# Altium PCB Copy of BMS_Carrier_Board.PcbDoc (part 1 of 2)
Units mm, origin at the board's own origin, x right, y up, seen from the top; angles counter-clockwise.
Board outline 100 x 40 mm, 2 copper layers (Top Layer, Bottom Layer); 84 components, 80 nets, 335 pads, 18 vias.
Unrouted connection lines stored in the file: 187.
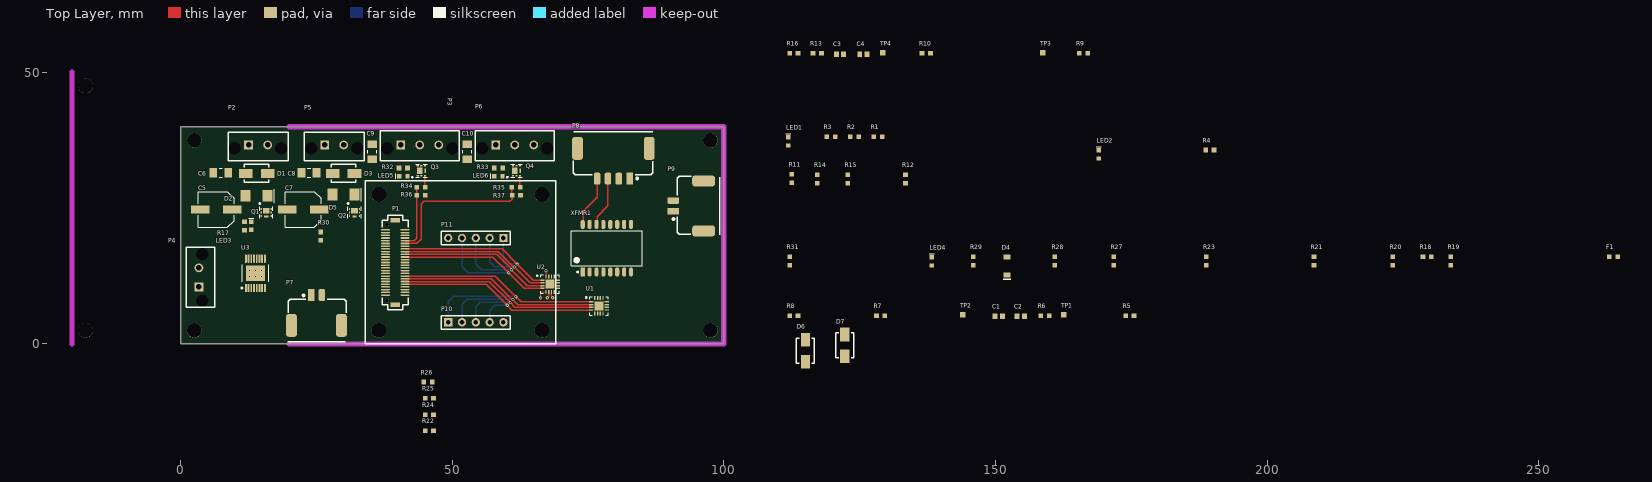
[diagram p0: Top Layer view]
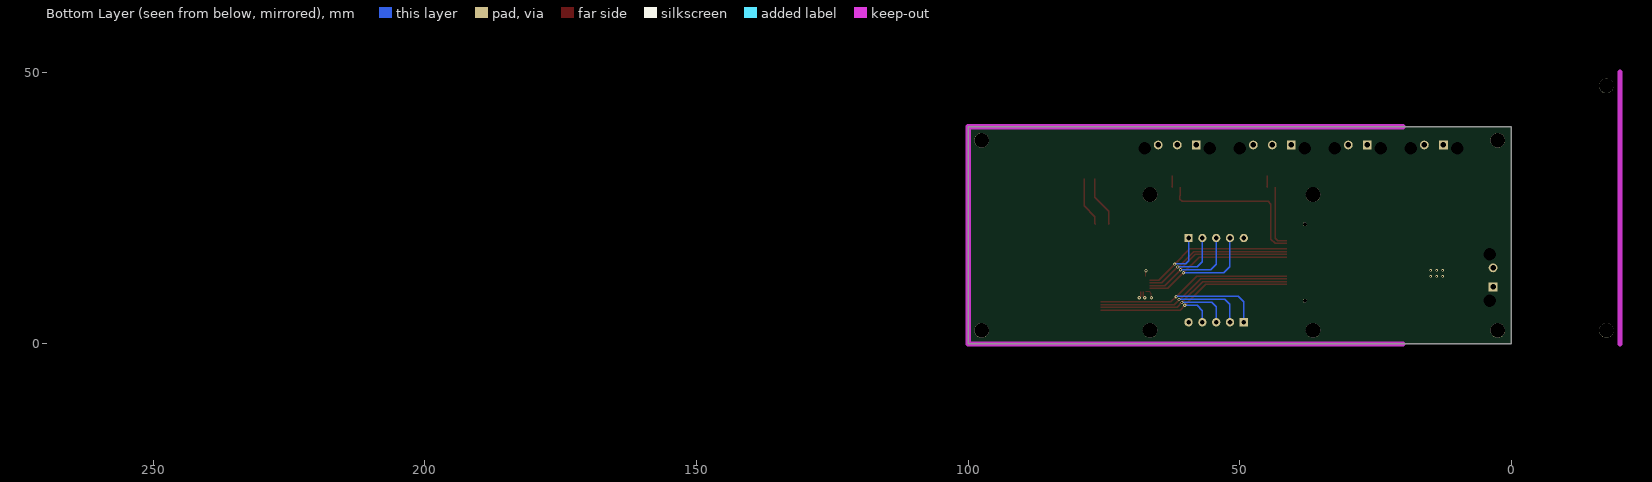
[diagram p1: Bottom Layer view, seen from below]

## Layer stack, top to bottom
Top Solder: solder mask 0.0102, Solder Resist, Dk 3.5
Top Layer: signal copper 0.0356
Dielectric 1: dielectric 0.32, FR-4, Dk 4.8
Bottom Layer: signal copper 0.0356
Bottom Solder: solder mask 0.0102, Solder Resist, Dk 3.5

## Board outline
0,0 0,40 100,40 100,0

## Design rules (kind name [scope] priority, off if disabled: settings)
Clearance [All] p1: gap=0.152 ignorepadtopadclearanceinfootprint=TRUE except(0: Arc-Hole Track-Hole SMDPad-Hole THPad-Hole Via-Hole Fill-Hole Poly-Hole Region-Hole Text-Hole)
DiffPairsRouting [All] p1: maxlimit=0.254 minlimit=0.254 mostfreqgap=0.254 toplayer_minwidth=0.229 toplayer_maxwidth=0.381 toplayer_prefwidth=0.254 bottomlayer_minwidth=0.229 bottomlayer_maxwidth=0.381 bottomlayer_prefwidth=0.254 maxuncoupledlength=12.7
PasteMaskExpansion [All] p1 off: expansion=0
PolygonConnect PolygonConnect_1 [IsPad and not InNet('NetD2_2')and not InNet('NetLED3_2')] p1: connectstyle=Relief reliefconductorwidth=0.381 reliefentries=4 polygonreliefangle="90 Angle" airgapwidth=0.254
PolygonConnect [Not(IsPad) or InNet('NetD2_2')or InNet('NetLED3_2')] p2: connectstyle=Direct reliefconductorwidth=0.254 reliefentries=4 polygonreliefangle="90 Angle" airgapwidth=0.254
RoutingVias [All] p1: holewidth=0.3 width=0.6 viastyle="Through Hole" minholewidth=0.3 minwidth=0.3 maxholewidth=1.27 maxwidth=1.27 viatemplateguid#1={C0391581-418B-4562-8F26-D689074507C8} viatemplatename#1=v60h30m0mx0
SilkToBoardRegionClearance [All] p1 off:
SilkToSilkClearance [All] p1 off: silktosilkclearance=0.254
SilkToSolderMaskClearance [IsPad] p1 off: minsilkscreentomaskgap=0.254 clearancetoexposedcopper=TRUE
SolderMaskExpansion [All] p1: expansion=0.102
Width [All] p1: maxlimit=2.54 minlimit=0.203 preferedwidth=0.203
25 further rules are at their usual default settings.

## Classes and differential pairs
component class "BMS Carrier - Fan Controls": C9 C10 D6 D7 LED5 LED6 Q3 Q4 R32 R33 R34 R35 R36 R37
component class "BMS Carrier - Battery Relay Controls": C5 C6 C7 C8 D1 D2 D3 D4 D5 F1 LED3 LED4 Q1 Q2 R17 R18 R19 R20 R21 R22 R23 R24 R25 R26 R27 R28 R29 R30 R31 U3
component class "BMS Carrier - Current Sense Interface": C3 C4 P11 R9 R10 R11 R12 R13 R14 R15 R16 TP3 TP4 U2 XFMR1
component class "BMS Carrier - AFE Interface": C1 C2 P10 R5 R6 R7 R8 TP1 TP2 TP3/MOSI U1
component class "BMS Carrier - Connectors": LED2 P2 P3 P4 P5 P6 P7 P8 P9 R4
component class Controller_Board_Interface: LED1 P1 R1 R2 R3
differential pair I: +I_P -I_N
differential pair ISOSPI: +ISOSPI_P -ISOSPI_N
differential pair CURR: +CURR_P -CURR_N
differential pair CURR_ISOSPI: +CURR_ISOSPI_P -CURR_ISOSPI_N

## Components (designator, comment, footprint, x,y, rotation, side; value= is the part's Value field where it differs from the comment)
C1 "CAP CER 0.1UF 50V 10% X7R 0603" "CAP, 0603" 150.57,5.099 r0 top
C2 "CAP CER 20PF 50V ±5% C0G/NP0 0603" "CAP, 0603" 154.634,5.099 r0 top
C3 "CAP CER 0.1UF 50V 10% X7R 0603" "CAP, 0603" 121.36,53.359 r0 top
C4 "CAP CER 20PF 50V ±5% C0G/NP0 0603" "CAP, 0603" 125.678,53.359 r0 top
C5 "EEE-1HA4R7NP" "CAP ALUM 6.3MM RADIAL SMD" 6.55,24.75 r180 top
C6 "CAP CER 2.2UF 100V ±20% X7R 1206" "CAP, 1206" 7.375,31.5 r180 top
C7 "EEE-1HA4R7NP" "CAP ALUM 6.3MM RADIAL SMD" 22.55,24.75 r180 top
C8 "CAP CER 2.2UF 100V ±20% X7R 1206" "CAP, 1206" 23.625,31.5 r180 top
C9 "CAP CER 2.2UF 100V ±20% X7R 1206" "CAP, 1206" 35.25,35.375 r270 top
C10 "CAP CER 2.2UF 100V ±20% X7R 1206" "CAP, 1206" 52.75,35.375 r270 top
D1 "DIODE SCHOTTKY 60V 3A SMA" "Diode, SMA" 16,31.4 r180 top
D2 "DIODE ZENER 16V 5W DO-214AA (SMB)" "DO-214AA Diode" 11.936,27.3 r0 top
D3 "DIODE SCHOTTKY 60V 3A SMA" "Diode, SMA" 32,31.4 r180 top
D4 "MMSD301T1G" "DIODE SOD123" 152.094,12.719 r90 top
D5 "DIODE ZENER 16V 5W DO-214AA (SMB)" "DO-214AA Diode" 27.936,27.5 r0 top
D6 "DIODE SCHOTTKY 60V 3A SMA" "Diode, SMA" 115,-3.25 r90 top
D7 "DIODE SCHOTTKY 60V 3A SMA" "Diode, SMA" 122.25,-2.25 r90 top
F1 "0603L004YR" "RES, 0603" 263.727,16.021 r0 top
LED1 "LED RED CLEAR 2V 0603" LED_0603 111.835,36.595 r90 top
LED2 "LED GREEN CLEAR 2V 0603" LED_0603 168.985,34.182 r90 top
LED3 "LED YELLOW CLEAR 2.1V 0603" LED_0603 13.01,21.05 r90 top
LED4 "LED YELLOW CLEAR 2.1V 0603" LED_0603 138.251,14.497 r90 top
LED5 "LED YELLOW CLEAR 2.1V 0603" LED_0603 41.7,30.89 r180 top
LED6 "LED YELLOW CLEAR 2.1V 0603" LED_0603 59.2,30.89 r180 top
P1 "CONN 50POS Bergstak Plug 0.02\"" "CONN, Bergstak 50 Pos Plug" 39.5,15 r0 top
P2 "CONN 2POS ULTRA-FIT NATURAL COLOR 0.138\"" "CONN, 2POS ULTRA-FIT - NATURAL COLOR" 12.5,36.63 r0 top
P3 "CONN 3POS ULTRA-FIT 0.138\"" "CONN, 3POS ULTRA-FIT" 40.5,36.63 r0 top
P4 "CONN 2POS ULTRA-FIT 0.138\"" "CONN, 2POS ULTRA-FIT" 3.37,10.5 r90 top
P5 "CONN 2POS ULTRA-FIT NATURAL COLOR 0.138\"" "CONN, 2POS ULTRA-FIT - NATURAL COLOR" 26.5,36.63 r0 top
P6 "CONN 3POS ULTRA-FIT 0.138\"" "CONN, 3POS ULTRA-FIT" 58,36.63 r0 top
P7 "Dura-Clik" "CONN, 2POS Dura-Click Vertical" 24,9 r0 top
P8 "Dura-Clik" "CONN, 4POS DURA-CLIK VERT" 82.65,30.42 r180 top
P9 "Dura-Clik" "CONN, 2POS Dura-Click Vertical" 90.67,24.4 r90 top
P10 "5POS 0.1\"" "CONN, 5POS HEADR 0.1\"" 49.25,4 r0 top
P11 "5POS 0.1\"" "CONN, 5POS HEADR 0.1\"" 59.41,19.5 r180 top
Q1 "MOSFET N-CH 30V 8.7A 2.1W 6-PQFN (2x2)" "MOSFET N-CH 30V 12A 2mmx2mm PQFN" 14.825,24.85 r270 top
Q2 "MOSFET N-CH 30V 8.7A 2.1W 6-PQFN (2x2)" "MOSFET N-CH 30V 12A 2mmx2mm PQFN" 31.075,24.85 r270 top
Q3 "MOSFET N-CH 30V 8.7A 2.1W 6-PQFN (2x2)" "MOSFET N-CH 30V 12A 2mmx2mm PQFN" 43.65,30.955 r0 top
Q4 "MOSFET N-CH 30V 8.7A 2.1W 6-PQFN (2x2)" "MOSFET N-CH 30V 12A 2mmx2mm PQFN" 61.15,30.955 r0 top
R1 "RES 0.0 OHM 1/4W 0603" "RES, 0603" 128.345,38.119 r0 top
R2 "RES 604 OHM 1% 1/10W 0603" "RES, 0603" 124.027,38.119 r0 top
R3 "RES 0.0 OHM 1/4W 0603" "RES, 0603" 119.709,38.119 r0 top
R4 "RES 4.7K OHM 1% 1/10W 0603" "RES, 0603" 189.432,35.706 r0 top
R5 "2K" "RES, 0603" 174.7,5.226 r0 top
R6 "RES 120 OHM 1% 1/10W 0603" "RES, 0603" 159.079,5.226 r0 top
R7 "RES 1.4k OHM 1% 1/10W 0603" "RES, 0603" 128.853,5.226 r0 top
R8 "RES 604 OHM 1% 1/10W 0603" "RES, 0603" 112.851,5.226 r0 top
R9 "2K" "RES, 0603" 166.191,53.486 r0 top
R10 "RES 120 OHM 1% 1/10W 0603" "RES, 0603" 137.235,53.486 r0 top
R11 "RES 0.0 OHM 1/4W 0603" "RES, 0603" 112.451,30.48 r90 top
R12 "RES 0.0 OHM 1/4W 0603" "RES, 0603" 133.425,30.372 r90 top
R13 "RES 1.4k OHM 1% 1/10W 0603" "RES, 0603" 117.169,53.486 r0 top
R14 "RES 0.0 OHM 1/4W 0603" "RES, 0603" 117.169,30.372 r90 top
R15 "RES 0.0 OHM 1/4W 0603" "RES, 0603" 122.757,30.372 r90 top
R16 "RES 604 OHM 1% 1/10W 0603" "RES, 0603" 112.851,53.486 r0 top
R17 "RES 4.7K OHM 1% 1/10W 0603" "RES, 0603" 11.75,21.725 r270 top
R18 "RES 10K OHM 1% 1/10W 0603" "RES, 0603" 229.437,16.021 r0 top
R19 "RES 10K OHM 1% 1/10W 0603" "RES, 0603" 233.755,15.259 r90 top
R20 "RES 22.1 OHM 1% 1/10W 0603" "RES, 0603" 223.087,15.259 r90 top
R21 "RES 10K OHM 1% 1/10W 0603" "RES, 0603" 208.609,15.259 r90 top
R22 "RES 10K OHM 1% 1/10W 0603" "RES, 0603" 45.775,-16 r180 top
R23 "RES 10K OHM 1% 1/10W 0603" "RES, 0603" 188.797,15.259 r90 top
R24 "RES 10K OHM 1% 1/10W 0603" "RES, 0603" 45.775,-13 r180 top
R25 "RES 10K OHM 1% 1/10W 0603" "RES, 0603" 45.775,-10 r180 top
R26 "RES 10K OHM 1% 1/10W 0603" "RES, 0603" 45.55,-7 r180 top
R27 "RES 806 OHM 1% 1/10W 0603" "RES, 0603" 171.779,15.259 r90 top
R28 "RES 4.7K OHM 1% 1/10W 0603" "RES, 0603" 160.857,15.259 r90 top
R29 "RES 4.7K OHM 1% 1/10W 0603" "RES, 0603" 145.871,15.259 r90 top
R30 "RES 22.1 OHM 1% 1/10W 0603" "RES, 0603" 25.797,19.837 r90 top
R31 "RES 10K OHM 1% 1/10W 0603" "RES, 0603" 112.089,15.259 r90 top
R32 "RES 4.7K OHM 1% 1/10W 0603" "RES, 0603" 40.975,32.38 r0 top
R33 "RES 4.7K OHM 1% 1/10W 0603" "RES, 0603" 58.525,32.38 r0 top
R34 "RES 22.1 OHM 1% 1/10W 0603" "RES, 0603" 44.225,28.88 r180 top
R35 "RES 22.1 OHM 1% 1/10W 0603" "RES, 0603" 61.725,28.88 r180 top
R36 "RES 10K OHM 1% 1/10W 0603" "RES, 0603" 44.225,27.38 r0 top
R37 "RES 10K OHM 1% 1/10W 0603" "RES, 0603" 61.775,27.38 r0 top
TP1 "Test Point" "Test Point" 162.508,5.353 r90 top
TP2 "Test Point" "Test Point" 143.966,5.353 r90 top
TP3 "Test Point" "Test Point" 158.698,53.613 r90 top
TP4 "Test Point" "Test Point" 129.234,53.613 r90 top
U1 "IC ISOSPI COMM INTERFACE LTC6820IUD" "IC COMM INTERFACE ISOSPI 16-QFN" 75.575,7.75 r0 top
U2 "IC ISOSPI COMM INTERFACE LTC6820IUD" "IC COMM INTERFACE ISOSPI 16-QFN" 66.575,11.75 r0 top
U3 "VNQ7040AJTR" "IC DVR HIGH-SIDE 1CH POWERSSO-16" 13.75,13 r90 top
XFMR1 "IC PULSE XFMR 1CT:1CT 350UH SMD" "IC, PULSE XFMR 1CT:1CT 350UH SMD" 78.445,17.625 r90 top

## Footprints (in the part's own frame and the unit in brackets; to place one, negate y for a bottom-side part, rotate by r counter-clockwise, add the part's x,y. Pads: shape width x height; smd on the part's side, far side on the other; paste and mask are expansions set on the pad)
"CAP ALUM 6.3MM RADIAL SMD" [mm] "Aluminum Electrolytic Capacitor, Body 6.50x6.50x5.50mm, IPC Low Density"
  rect 3.45x1.55 smd: 1(-2.95,0) 2(2.95,0)
  silkscreen extent -3.3,-3.3 3.3,3.3, body extent -3.9,-3.3 3.9,3.3, height 5.5
"CAP, 0603" [mm] "Chip Capacitor, 2-Leads, Body 1.60x0.81mm, IPC Medium Density"
  rect 0.9x1 smd mask+0.076: 1(-0.675,0) 2(0.675,0)
  body extent -0.87,-0.48 0.87,0.48, height 0.9
"CAP, 1206" [mm] "Chip Capacitor, 2-Leads, Body 3.20x1.60mm, IPC Medium Density"
  rect 1.4x1.8 smd: 1(-1.375,0) 2(1.375,0)
  silkscreen extent -0.3,-0.8 0.3,0.8, body extent -1.68,-0.87 1.67,0.87, height 1.8
"CONN, 2POS Dura-Click Vertical" [mm] "WM7169CT-ND"
  rect 1.2x2.2 smd: 1(0,0)
  rrect50% 1.2x2.2 smd: 2(2,0)
  rrect50% 2x4.2 smd: 3(-3.6,-5.58) 3(5.6,-5.58)
  silkscreen extent -4.28,-8.6 6.5,0.05, body extent -4.45,-8.63 6.45,0.52, height 8
"CONN, 2POS ULTRA-FIT" [mm] "2 Positions Header, Shrouded Connector 0.138\" (3.50mm) Through Hole Gold"
  rect 1.6x1.6 hole 1.02: 1(0,0)
  round 1.6 hole 1.02: 2(3.5,0)
  round 1.6 hole 2.3: ""(-2.5,-0.63) ""(6,-0.63)
  silkscreen extent -3.74,-2.93 7.33,2.37, body extent -3.48,-2.87 7.12,5.79, height 13.85
"CONN, 2POS ULTRA-FIT - NATURAL COLOR" [mm] "2 Positions Header, Shrouded Connector 0.138\" (3.50mm) Through Hole Gold"
  rect 1.6x1.6 hole 1.02: 1(0,0)
  round 1.6 hole 1.02: 2(3.5,0)
  round 1.6 hole 2.3: ""(-2.5,-0.63) ""(6,-0.63)
  silkscreen extent -3.74,-2.93 7.33,2.37, body extent -3.48,-2.87 7.12,5.79, height 13.85
"CONN, 3POS ULTRA-FIT" [mm]
  rect 1.6x1.6 hole 1.02: 1(0,0)
  round 1.6 hole 1.02: 2(3.5,0) 3(7,0)
  round 0 hole 2.3: ""(-2.5,-0.63) ""(9.5,-0.63)
  silkscreen extent -3.8,-2.93 10.8,2.62, body extent -3.55,-2.67 10.55,5.99, height 13.85
"CONN, 4POS DURA-CLIK VERT" [mm]
  rect 1.2x2.2 smd: 1(0,0)
  rrect50% 1.2x2.2 smd: 2(2,0) 3(4,0) 4(6,0)
  rrect50% 2x4.2 smd: 7(-3.6,-5.58) 7(9.6,-5.58)
  silkscreen extent -4.28,-8.61 10.42,0.05, body extent -4.28,-8.61 10.32,0.54, height 8
"CONN, 5POS HEADR 0.1\"" [mil]
  rect 60x60 hole 33.46: 1(0,0)
  round 60 hole 33.46: 2(100,0) 3(200,0) 4(300,0) 5(400,0)
  silkscreen extent -50,-50 450,48, body extent -50,-50 450,48, height 335
"CONN, Bergstak 50 Pos Plug" [mm] "Bergstak 50 Position Plug"
  rect 1.6x0.3 smd: 1(1.8,6)
  oval 1.6x0.3 smd: 2(1.8,5.5) 3(1.8,5) 4(1.8,4.5) 5(1.8,4) 6(1.8,3.5) 7(1.8,3) 8(1.8,2.5) 9(1.8,2) 10(1.8,1.5) 11(1.8,1) 12(1.8,0.5) 13(1.8,0) 14(1.8,-0.5) 15(1.8,-1) 16(1.8,-1.5) 17(1.8,-2) 18(1.8,-2.5) 19(1.8,-3) 20(1.8,-3.5) 21(1.8,-4) 22(1.8,-4.5) 23(1.8,-5) 24(1.8,-5.5) 25(1.8,-6) 26(-1.8,-6) 27(-1.8,-5.5) 28(-1.8,-5) 29(-1.8,-4.5) 30(-1.8,-4) 31(-1.8,-3.5) 32(-1.8,-3) 33(-1.8,-2.5) 34(-1.8,-2) 35(-1.8,-1.5) 36(-1.8,-1) 37(-1.8,-0.5) 38(-1.8,0) 39(-1.8,0.5) 40(-1.8,1) 41(-1.8,1.5) 42(-1.8,2) 43(-1.8,2.5) 44(-1.8,3) 45(-1.8,3.5) 46(-1.8,4) 47(-1.8,4.5) 48(-1.8,5) 49(-1.8,5.5) 50(-1.8,6)
  round 0.7 hole 0.7: ""(-1.5,-7.05) ""(-1.5,7.05)
  rect 1.8x0.8 smd: ""(0,-7.8) ""(0,7.8)
  silkscreen extent -2.4,-8.7 2.4,8.7
"DIODE SOD123" [mm]
  rect 0.91x1.22 smd: 1(0,0) 2(3.28,0)
  silkscreen extent -0.8,-0.7 -0.8,0.7, body extent -0.22,-0.9 3.49,0.9, height 1.35
"Diode, SMA" [mm]
  rect 2.5x1.7 smd: 1(0,0) 2(4,0)
  silkscreen extent -0.25,-1.65 4.32,1.65, body extent -0.69,-1.45 4.59,1.47, height 2.41
"DO-214AA Diode" [mil] "Zener Diode 16V 5W SMBJ5353B-TP"
  rect 70x85 smd: 1(0,0) 2(160,0)
  silkscreen extent 209,-50 209,47, body extent -21,-60 187,55, height 95
"IC COMM INTERFACE ISOSPI 16-QFN" [mm] "16-WFQFN Exposed Pad"
  rect 0.75x0.25 smd: 1(0,0) 2(0,-0.5) 3(0,-1) 4(0,-1.5) 9(2.85,-1.5) 10(2.85,-1) 11(2.85,-0.5) 12(2.85,0)
  rect 0.25x0.75 smd: 5(0.675,-2.175) 6(1.175,-2.175) 7(1.675,-2.175) 8(2.175,-2.175) 13(2.175,0.675) 14(1.675,0.675) 15(1.175,0.675) 16(0.675,0.675)
  rect 1.65x1.65 smd: 17(1.425,-0.75)
  silkscreen extent -1.05,-2.45 3.13,0.95, body extent -0.17,-2.35 3.03,0.85, height 0.8
"IC DVR HIGH-SIDE 1CH POWERSSO-16" [mm] "SSOP, 16-Leads, Body 4.90x3.90mm, Pitch 0.50mm, Thermal Pad 3.50x2.80mm, IPC Medium Density"
  rect 1.5x0.35 smd: 1(-2.7,1.75)
  rrect50% 1.5x0.35 smd: 2(-2.7,1.25) 3(-2.7,0.75) 4(-2.7,0.25) 5(-2.7,-0.25) 6(-2.7,-0.75) 7(-2.7,-1.25) 8(-2.7,-1.75) 9(2.7,-1.75) 10(2.7,-1.25) 11(2.7,-0.75) 12(2.7,-0.25) 13(2.7,0.25) 14(2.7,0.75) 15(2.7,1.25) 16(2.7,1.75)
  rect 2.8x3.5 smd: 17(0,0)
  silkscreen extent -2.82,-2.45 1.55,2.6, body extent -3,-2.45 3,2.45, height 1.7
"IC, PULSE XFMR 1CT:1CT 350UH SMD" [mm] "PULSE XFMR 1CT:1CT 350UH SMD"
  rect 1.7x0.76 smd: 1(-4.375,4.445)
  oval 1.7x0.76 smd: 2(-4.375,3.175) 3(-4.375,1.905) 4(-4.375,0.635) 5(-4.375,-0.635) 6(-4.375,-1.905) 7(-4.375,-3.175) 8(-4.375,-4.445) 9(4.375,-4.445) 10(4.375,-3.175) 11(4.375,-1.905) 12(4.375,-0.635) 13(4.375,0.635) 14(4.375,1.905) 15(4.375,3.175) 16(4.375,4.445)
  silkscreen extent -4.5,-6.55 3.2,6.55, body extent -4.65,-6.55 4.65,6.55, height 5.9
LED_0603 [mm]
  rect 0.8x0.8 smd: 1(-0.05,0.01) 2(1.45,0.01)
  silkscreen extent 2.13,-0.46 2.13,0.45, body extent -0.09,-0.39 1.51,0.41, height 0.8
"MOSFET N-CH 30V 12A 2mmx2mm PQFN" [mm] "PQFN, 6-Leads, Body 2.00x2.00mm, Pitch 0.65mm/0.50mm, Thermal Pad 1.00x1.20mm, IPC Medium Density"
  rect 0.4x0.25 smd: 1(0,0) 2(0.65,0) 3(1.3,0) 4(1.3,1.85) 5(0.65,1.85) 6(0,1.85)
  rect 1x1.2 smd: 7(0.35,0.925)
  rect 0.3x0.79 smd: 8(1.39,0.925)
  silkscreen extent -1.14,-0.38 1.7,2.12, body extent -0.4,-0.13 1.7,1.97, height 1
"RES, 0603" [mm] "Chip Resistor, 2-Leads, Body 1.60x0.80mm, IPC Medium Density"
  rect 0.85x0.85 smd: 1(-0.775,0) 2(0.775,0)
  body extent -0.8,-0.4 0.8,0.4, height 0.55
"Test Point" [mm]
  rect 1x1 smd paste-2: TP(0,0)

## Part data
C1 C3: "0.10µF ±10% 50V Ceramic Capacitor X7R 0603 (1608 Metric)", Capacitance=0.1µF, Manufacturer 1="AVX Corporation", Manufacturer Part Number 1=06035C104KAT2A, Operating Temperature="-55°C ~ 125°C", Package / Case="0603 (1608 Metric)", Ratings=-, Supplier Part Number 1=478-5052-1-ND, Temperature Coefficient=X7R, Tolerance=±10%, Voltage=50V, ComponentLink1Description=http://datasheets.avx.com/X7RDielectric.pdf, ComponentLink1URL=http://datasheets.avx.com/X7RDielectric.pdf, Height - Seated (Max)=-, Lead Spacing=-, Lead Style=-, Mounting Type="Surface Mount, MLCC", Packaging="Cut Tape (CT)", Part Status=Active, Size / Dimension="0.063\" L x 0.032\" W (1.60mm x 0.81mm)", Supplier 1=Digi-Key, Thickness (Max)="0.035\" (0.90mm)"
C2 C4: "20pF ±5% 50V Ceramic Capacitor C0G, NP0 0603 (1608 Metric)", Capacitance=20pF, Manufacturer 1="Murata Electronics North America", Manufacturer Part Number 1=GRM1885C1H200JA01D, Operating Temperature="-55°C ~ 125°C", Package / Case="0603 (1608 Metric)", Ratings=-, Supplier Part Number 1=490-1410-1-ND, Temperature Coefficient="C0G, NP0", Tolerance=±5%, Voltage=50V, ComponentLink1Description=http://www.murata.com/~/media/webrenewal/support/library/catalog/products/capacitor/mlcc/c02e.ashx, ComponentLink1URL=http://www.murata.com/~/media/webrenewal/support/library/catalog/products/capacitor/mlcc/c02e.ashx, Height - Seated (Max)=-, Lead Spacing=-, Lead Style=-, Mounting Type="Surface Mount, MLCC", Packaging="Cut Tape (CT)", Part Status=Active, Size / Dimension="0.063\" L x 0.031\" W (1.60mm x 0.80mm)", Supplier 1=Digi-Key, Thickness (Max)="0.035\" (0.90mm)"
C5 C7: library part "CAP ALUM 4.7UF 20% 50V SMD", "4.7µF 50V Aluminum Electrolytic Capacitors Radial, Can - SMD 2000 Hrs @ 85°C", Capacitance=4.7uF, Case/Package=Radial, Manufacturer 1=Panasonic, Max Operating Temperature=85°C, Min Operating Temperature=-40°C, Package Quantity=1, Ripple Current=31mA, Supplier Part Number 1=PCE4304CT-ND, Tolerance=20%, Voltage Rating=50V, ComponentLink1Description=https://datasheet.ciiva.com/46374/aba0000ce2-46374373.pdf, ComponentLink1URL=https://datasheet.ciiva.com/46374/aba0000ce2-46374373.pdf, ComponentLink2Description=https://datasheet.ciiva.com/14600/70255710-14600343.pdf, ComponentLink2URL=https://datasheet.ciiva.com/14600/70255710-14600343.pdf, ComponentLink3Description=https://datasheet.ciiva.com/17536/aba0000ce2-17536647.pdf, ComponentLink3URL=https://datasheet.ciiva.com/17536/aba0000ce2-17536647.pdf, ComponentLink4Description=https://datasheet.ciiva.com/24027/aba0000ce2-40801-24027083.pdf, ComponentLink4URL=https://datasheet.ciiva.com/24027/aba0000ce2-40801-24027083.pdf, ComponentLink5Description=https://datasheet.ciiva.com/31414/aba0000ce2-31414684.pdf, ComponentLink5URL=https://datasheet.ciiva.com/31414/aba0000ce2-31414684.pdf, ComponentLink6Description=https://datasheet.ciiva.com/14606/70255710-14606079.pdf, ComponentLink6URL=https://datasheet.ciiva.com/14606/70255710-14606079.pdf, Description 1="CAPACITOR ALUM ELEC, 4.7UF, 50V, 20%, SMD", Diameter=6.3mm, Height=5.4mm, Height - Seated (Max)=0.213inch, Lead Free="Lead Free", Length=5.5mm, Life (Hours)=2000Hour, Manufacturer Part Number 1=EEE-1HA4R7NP, Mount="Surface Mount,PCB", Packaging="Tape and Reel", Pricing 1="1=0.43, 10=0.302, 100=0.1986, 500=0.1471 (USD)", Radiation Hardening=No, REACH SVHC="No SVHC", Ripple Current (AC)=31mA, Stock 1=19771, Supplier 1=Digi-Key, Termination=SMD/SMT, Voltage Rating (DC)=50V, Width=650um
C6 C8 C9 C10: "2.2µF ±20% 100V Ceramic Capacitor X7R 1206 (3216 Metric)", Capacitance=2.2µF, Manufacturer 1="Murata Electronics North America", Manufacturer Part Number 1=GRM31CR72A225MA73L, Operating Temperature="-55°C ~ 125°C", Package / Case="1206 (3216 Metric)", Ratings=-, Supplier Part Number 1=490-12773-1-ND, Temperature Coefficient=X7R, Tolerance=±20%, Voltage=100V, ComponentLink1Description=http://www.murata.com/~/media/webrenewal/support/library/catalog/products/capacitor/mlcc/c02e.ashx, ComponentLink1URL=http://www.murata.com/~/media/webrenewal/support/library/catalog/products/capacitor/mlcc/c02e.ashx, Height - Seated (Max)=-, Lead Spacing=-, Lead Style=-, Mounting Type="Surface Mount, MLCC", Packaging="Cut Tape (CT)", Part Status=Active, Size / Dimension="0.126\" L x 0.063\" W (3.20mm x 1.60mm)", Supplier 1=Digi-Key, Thickness (Max)="0.071\" (1.80mm)"
D1 D3 D6 D7: "Diode Schottky 60V 3A Surface Mount SMA", Capacitance @ Vr, F="200pF @ 4V, 1MHz", Current - Average Rectified (Io)=3A, Current - Reverse Leakage @ Vr="500µA @ 60V", Manufacturer 1="Diodes Incorporated", Manufacturer Part Number 1=B360A-13-F, Operating Temperature - Junction="-55°C ~ 150°C", Package / Case="DO-214AC, SMA", Supplier Device Package=SMA, Supplier Part Number 1=B360A-FDICT-ND, Voltage - DC Reverse (Vr) (Max)=60V, Voltage - Forward (Vf) (Max) @ If="700mV @ 3A", ComponentLink1Description=https://www.diodes.com/assets/Datasheets/ds30891.pdf, ComponentLink1URL=https://www.diodes.com/assets/Datasheets/ds30891.pdf, Diode Type=Schottky, Mounting Type="Surface Mount", Packaging="Cut Tape (CT)", Part Status=Active, Speed="Fast Recovery =< 500ns, > 200mA (Io)", Supplier 1=Digi-Key
D2 D5: "Zener Diode 16V 5W ±5% Surface Mount DO-214AA (SMB)", Manufacture="Micro Commercial Co", Manufacture Part Number=SMBJ5353B-TP, Power (Max)=5W, Supplier Part Number 1=SMBJ5353B-TPMSCT-ND, Voltage - Forward="1.2V @ 1A", Voltage - Zener (Nom)=16V, Impedence (Max)="2.5 Ohm", Supplier 1=Digi-Key
D4: library part "DIODE SCHOTTKY SMALL SIG 30V 200MA SOD123", "Diode Schottky 30V 200mA (DC) Surface Mount SOD-123", Average Rectified Current=200mA, Case/Package=SOD-123-2, Current Rating=100mA, Forward Voltage=600mV, Manufacturer 1="ON Semiconductor", Max Forward Surge Current (Ifsm)=1A, Max Operating Temperature=125°C, Max Repetitive Reverse Voltage (Vrrm)=30V, Max Reverse Leakage Current=200nA, Min Operating Temperature=-55°C, Package Quantity=3000, Power Dissipation=225mW, Supplier Part Number 1=MMSD301T1GOSCT-ND, ComponentLink1Description=https://datasheet.ciiva.com/927/mmsd301t1-d-927472.pdf, ComponentLink1URL=https://datasheet.ciiva.com/927/mmsd301t1-d-927472.pdf, ComponentLink2Description=https://datasheet.ciiva.com/5763/85966-5763040.pdf, ComponentLink2URL=https://datasheet.ciiva.com/5763/85966-5763040.pdf, ComponentLink3Description=https://datasheet.ciiva.com/915/mmsd301t1-d-915476.pdf, ComponentLink3URL=https://datasheet.ciiva.com/915/mmsd301t1-d-915476.pdf, ComponentLink4Description=https://datasheet.ciiva.com/915/mmsd301t1-d-915477.pdf, ComponentLink4URL=https://datasheet.ciiva.com/915/mmsd301t1-d-915477.pdf, ComponentLink5Description=https://datasheet.ciiva.com/915/mmsd301t1-d-915478.pdf, ComponentLink5URL=https://datasheet.ciiva.com/915/mmsd301t1-d-915478.pdf, ComponentLink6Description=https://datasheet.ciiva.com/25947/mmsd301t1-d-25947942.pdf, ComponentLink6URL=https://datasheet.ciiva.com/25947/mmsd301t1-d-25947942.pdf, ComponentLink7Description=https://datasheet.ciiva.com/8299/mmsd301t1-d-8299881.pdf, ComponentLink7URL=https://datasheet.ciiva.com/8299/mmsd301t1-d-8299881.pdf, ComponentLink8Description=https://datasheet.ciiva.com/16215/mmsd301t1-d-16215580.pdf, ComponentLink8URL=https://datasheet.ciiva.com/16215/mmsd301t1-d-16215580.pdf, Contact Plating=Tin,Matte, Description 1="DIODE SCHOTTKY 30V 200MA SOD123", Element Configuration=Single, Forward Current=200mA, Height=1.25mm, Lead Free="Lead Free", Length=2.84mm, Manufacturer Part Number 1=MMSD301T1G, Max Reverse Voltage (DC)=30V, Number of Pins=2, Output Current=200mA, Packaging="Tape and Reel", Peak Reverse Current=200nA, Polarity=Standard, Pricing 1="1=0.37, 10=0.301, 100=0.1597, 500=0.1051, 1000=0.0714 (USD)", Radiation Hardening=No, REACH SVHC="No SVHC", Reverse Voltage (DC)=30V, Stock 1=23461, Supplier 1=Digi-Key, Termination=SMD/SMT, Voltage Rating (DC)=30V, Width=1.8mm
F1: library part "FUSE PTC RESET 24V 40MA 0603", "Polymeric PTC Resettable Fuse 24V 40mA Ih Surface Mount 0603 (1608 Metric), Concave", Case/Package=0603, Case Code (Metric)=1608, Hold Current=40mA, Manufacturer 1=Littelfuse, Max Current Rating=20A, Max Operating Temperature=85°C, Max Voltage Rating (DC)=24V, Min Operating Temperature=-40°C, Package Quantity=4000, Power Dissipation=500mW, Supplier Part Number 1=F6263CT-ND, Trip Current=120mA, Approvals=cULus,TUV, Case Code (Imperial)=0603, ComponentLink1Description=https://datasheet.ciiva.com/29603/littelfuse-ptc-0603l-29603319.pdf, ComponentLink1URL=https://datasheet.ciiva.com/29603/littelfuse-ptc-0603l-29603319.pdf, Description 1="PTC 24V POLYFUSE SMT 0603 .035A", Manufacturer Part Number 1=0603L004YR, Packaging="Tape and Reel", Pricing 1="1=2.61, 5=2.488, 10=2.363, 50=1.9068, 100=1.6166, 250=1.5751, 500=1.3264, 1000=1.1813 (USD)", Stock 1=21365, Supplier 1=Digi-Key, Time to Trip=1s
LED1: "Red 631nm LED Indication - Discrete 2V 0603 (1608 Metric)", Color=Red, Current - Test=20mA, Lens Color=Colorless, Manufacturer="Wurth Electronics Inc.", Manufacturer Part Number=150060RS75000, Millicandela Rating=250mcd, Package / Case="0603 (1608 Metric)", Supplier Device Package=0603, Supplier Part Number 1=732-4978-1-ND, Voltage - Forward (Vf) (Typ)=2V, Category=Optoelectronics, ComponentLink1Description=http://katalog.we-online.de/led/datasheet/150060RS75000.pdf, ComponentLink1URL=http://katalog.we-online.de/led/datasheet/150060RS75000.pdf, Features=-, Height (Max)=0.80mm, Lens Style/Size="Rectangle with Flat Top, 1.10mm x 0.70mm", Lens Transparency=Clear, Mounting Type="Surface Mount", Packaging="Cut Tape (CT)", Part Status=Active, Pricing 1="1=0.21, 100=0.1617, 500=0.13964 (CAD)", RoHS="RoHS Compliant", Size / Dimension="1.60mm L x 0.80mm W", Stock 1=35521, Supplier 1=Digi-Key, Viewing Angle=140°, Wavelength - Dominant=625nm, Wavelength - Peak=630nm
LED2: "Green 572nm LED Indication - Discrete 2V 0603 (1608 Metric)", Color=Green, Current - Test=20mA, Lens Color=Colorless, Manufacturer="Wurth Electronics Inc.", Manufacturer Part Number=150060VS75000, Millicandela Rating=40mcd, Package / Case="0603 (1608 Metric)", Supplier Device Package=0603, Supplier Part Number 1=732-4980-1-ND, Voltage - Forward (Vf) (Typ)=2V, Category=Optoelectronics, ComponentLink1Description=http://katalog.we-online.de/led/datasheet/150060VS75000.pdf, ComponentLink1URL=http://katalog.we-online.de/led/datasheet/150060VS75000.pdf, Features=-, Height (Max)=0.80mm, Lens Style/Size="Rectangle with Flat Top, 1.10mm x 0.70mm", Lens Transparency=Clear, Mounting Type="Surface Mount", Packaging="Cut Tape (CT)", Part Status=Active, Pricing 1="1=0.21, 100=0.1617, 500=0.13964 (CAD)", RoHS="RoHS Compliant", Size / Dimension="1.60mm L x 0.80mm W", Stock 1=9408, Supplier 1=Digi-Key, Viewing Angle=140°, Wavelength - Dominant=570nm, Wavelength - Peak=572nm
LED3 LED4 LED5 LED6: "Yellow 590nm LED Indication - Discrete 2V 0603 (1608 Metric)", Color=Yellow, Current - Test=20mA, Lens Color=Colorless, Manufacturer="Wurth Electronics Inc.", Manufacturer Part Number=150060YS75000, Millicandela Rating=120mcd, Package / Case="0603 (1608 Metric)", Supplier Device Package=0603, Supplier Part Number 1=732-4981-1-ND, Voltage - Forward (Vf) (Typ)=2V, Category=Optoelectronics, ComponentLink1Description=http://katalog.we-online.de/led/datasheet/150060YS75000.pdf, ComponentLink1URL=http://katalog.we-online.de/led/datasheet/150060YS75000.pdf, Features=-, Height (Max)=0.80mm, Lens Style/Size="Rectangle with Flat Top, 1.10mm x 0.70mm", Lens Transparency=Clear, Mounting Type="Surface Mount", Packaging="Cut Tape (CT)", Part Status=Active, Pricing 1="1=0.21, 100=0.1617, 500=0.13964 (CAD)", RoHS="RoHS Compliant", Size / Dimension="1.60mm L x 0.80mm W", Stock 1=10523, Supplier 1=Digi-Key, Viewing Angle=140°, Wavelength - Dominant=590nm, Wavelength - Peak=595nm
P1: "50 Position Connector Plug, Outer Shroud Contacts Surface Mount Gold", Manufacturer 1="Amphenol FCI", Manufacturer Part Number 1=10132797-055100LF, Supplier Part Number 1=609-5226-1-ND, ComponentLink1Description=http://portal.fciconnect.com/Comergent//fci/drawing/10132797.pdf, ComponentLink1URL=http://portal.fciconnect.com/Comergent//fci/drawing/10132797.pdf, Connector Type="Plug, Outer Shroud Contacts", Contact Finish=Gold, Contact Finish Thickness="1µin (0.025µm)", Height Above Board="0.169\" (4.30mm)", Mated Stacking Heights=5mm, Mounting Type="Surface Mount", Number of Positions=50, Number of Rows=2, Packaging="Cut Tape (CT)", Part Status=Active, Pitch="0.020\" (0.50mm)", Series="BergStak Plug", Supplier 1=Digi-Key
P2 P5: "2 Positions Header, Shrouded Connector 0.138\" (3.50mm) Through Hole", Color=White, Current Rating=-, Insulation Color=Natural, Manufacturer 1="Molex, LLC", Manufacturer Part Number 1=1722872102, Material Flammability Rating="UL94 V-0", Operating Temperature="-40°C ~ 105°C", Supplier Part Number 1=WM11722-ND, Voltage=400V, ComponentLink1Description=http://www.molex.com/pdm_docs/sd/1722872102_sd.pdf, ComponentLink1URL=http://www.molex.com/pdm_docs/sd/1722872102_sd.pdf, Connector Type=Header, Contact Finish - Mating=Tin, Contact Finish - Post=Tin, Contact Finish Thickness - Mating="60µin (1.52µm)", Contact Finish Thickness - Post="60µin (1.52µm)", Contact Length - Mating=-, Contact Length - Post="0.126\" (3.20mm)", Contact Material="Copper Alloy", Contact Shape=Square, Contact Type="Male Pin", Fastening Type="Latch Holder", Ingress Protection=-, Insulation Height="0.465\" (11.80mm)", Insulation Material="Liquid Crystal Polymer (LCP)", Mated Stacking Heights=26.99mm, Mounting Type="Through Hole", Number of Positions=2, Number of Positions Loaded=All, Number of Rows=1, Overall Contact Length=-, Packaging=Tray, Part Status=Active, Pitch - Mating="0.138\" (3.50mm)", Row Spacing - Mating=-, Series=UltraFit, Shrouding="Shrouded - 4 Wall", Style="Board to Cable/Wire", Supplier 1=Digi-Key, Termination=Solder
P3 P6: "3 Positions Header Connector 0.138\" (3.50mm) Through Hole Tin", Current Rating=-, Insulation Color=Black, Manufacturer 1="Molex, LLC", Manufacturer Part Number 1=1722871103, Material Flammability Rating="UL94 V-0", Operating Temperature="-40°C ~ 105°C", Supplier Part Number 1=WM11702-ND, Voltage=400V, ComponentLink1Description=http://www.molex.com/pdm_docs/sd/1722871103_sd.pdf, ComponentLink1URL=http://www.molex.com/pdm_docs/sd/1722871103_sd.pdf, Connector Type=Header, Contact Finish - Mating=Tin, Contact Finish - Post=Tin, Contact Finish Thickness - Mating="60µin (1.52µm)", Contact Finish Thickness - Post="60µin (1.52µm)", Contact Length - Mating=-, Contact Length - Post="0.126\" (3.20mm)", Contact Material="Copper Alloy", Contact Shape=Square, Contact Type="Male Pin", Fastening Type="Latch Holder", Ingress Protection=-, Insulation Height="0.465\" (11.80mm)", Insulation Material="Liquid Crystal Polymer (LCP)", Mated Stacking Heights=26.99mm, Mounting Type="Through Hole", Number of Positions=3, Number of Positions Loaded=All, Number of Rows=1, Overall Contact Length=-, Packaging=Tray, Part Status=Active, Pitch - Mating="0.138\" (3.50mm)", Row Spacing - Mating=-, Series=UltraFit, Shrouding="Shrouded - 4 Wall", Style="Board to Cable/Wire", Supplier 1=Digi-Key, Termination=Solder
P4: "2 Positions Header, Shrouded Connector 0.138\" (3.50mm) Through Hole Gold", Current Rating=-, Insulation Color=Black, Manufacturer 1="Molex, LLC", Manufacturer Part Number 1=1722861302, Material Flammability Rating="UL94 V-0", Operating Temperature="-40°C ~ 120°C", Supplier Part Number 1=WM11673-ND, Voltage=400V, ComponentLink1Description=http://www.molex.com/pdm_docs/sd/1722861302_sd.pdf, ComponentLink1URL=http://www.molex.com/pdm_docs/sd/1722861302_sd.pdf, Connector Type=Header, Contact Finish - Mating=Gold, Contact Finish - Post=Tin, Contact Finish Thickness - Mating="30µin (0.76µm)", Contact Finish Thickness - Post="60µin (1.52µm)", Contact Length - Mating=-, Contact Length - Post="0.126\" (3.20mm)", Contact Material="Copper Alloy", Contact Shape=Square, Contact Type="Male Pin", Fastening Type="Latch Holder", Ingress Protection=-, Insulation Height="0.465\" (11.80mm)", Insulation Material="Liquid Crystal Polymer (LCP)", Mated Stacking Heights=26.99mm, Mounting Type="Through Hole", Number of Positions=2, Number of Positions Loaded=All, Number of Rows=1, Overall Contact Length=-, Packaging=Tray, Part Status=Active, Pitch - Mating="0.138\" (3.50mm)", Row Spacing - Mating=-, Series=UltraFit, Shrouding="Shrouded - 4 Wall", Style="Board to Board or Cable", Supplier 1=Digi-Key, Termination="Kinked Pin, Solder"
P7 P9: library part "CONN 2POS DURA-CLIK 0.079\" VERT", "2 Positions Header, Shrouded Connector 0.079\" (2.00mm) Surface Mount, Vertical Tin", Current Rating=-, Insulation Color=Natural, Manufacturer="Molex, LLC", Manufacturer Part Number=5600200220, Supplier Part Number 1=WM10862CT-ND, Applications="Automotive, Industrial", Category="Connectors, Interconnects", ComponentLink1Description=http://www.molex.com/pdm_docs/sd/5600200220_sd.pdf, ComponentLink1URL=http://www.molex.com/pdm_docs/sd/5600200220_sd.pdf, Connector Type=Header, Contact Finish - Mating=Tin, Contact Finish - Post=Tin, Contact Finish Thickness - Mating=-, Contact Finish Thickness - Post=-, Contact Length - Mating=-, Contact Length - Post=-, Contact Material="Copper Alloy", Contact Shape=Square, Contact Type="Male Pin", Fastening Type="Latch Lock", Features="Solder Retention", Ingress Protection=-, Insulation Height="0.315\" (8.00mm)", Insulation Material="Polyamide (PA), Nylon", Mated Stacking Heights=9.3mm, Material Flammability Rating=-, Mounting Type="Surface Mount", Number of Positions=2, Number of Positions Loaded=All, Number of Rows=1, Operating Temperature=-, Overall Contact Length=-, Packaging="Cut Tape (CT)", Part Status=Active, Pitch - Mating="0.079\" (2.00mm)", Pricing 1="1=1.16, 10=1.012, 25=0.952, 50=0.9122, 100=0.8727, 250=0.79336 (CAD)", RoHS="RoHS Compliant", Row Spacing - Mating=-, Shrouding="Shrouded - 4 Wall", Stock 1=11912, Style="Board to Cable/Wire", Supplier 1=Digi-Key, Termination=Solder, Voltage Rating=-
P8: library part "CONN 4POS DURA-CLIK 0.079\"", "4 Positions Header Connector 0.079\" (2.00mm) Surface Mount Tin", Current Rating=-, Insulation Color=Natural, Manufacturer="Molex, LLC", Manufacturer Part Number=5600200420, Supplier Part Number 1=WM10864CT-ND, Applications="Automotive, Industrial", Category="Connectors, Interconnects", ComponentLink1Description=http://www.molex.com/pdm_docs/sd/5600200420_sd.pdf, ComponentLink1URL=http://www.molex.com/pdm_docs/sd/5600200420_sd.pdf, Connector Type=Header, Contact Finish - Mating=Tin, Contact Finish - Post=Tin, Contact Finish Thickness - Mating=-, Contact Finish Thickness - Post=-, Contact Length - Mating=-, Contact Length - Post=-, Contact Material="Copper Alloy", Contact Shape=Square, Contact Type="Male Pin", Fastening Type="Latch Lock", Features="Solder Retention", Ingress Protection=-, Insulation Height="0.315\" (8.00mm)", Insulation Material="Polyamide (PA), Nylon", Mated Stacking Heights=9.3mm, Material Flammability Rating=-, Mounting Type="Surface Mount", Number of Positions=4, Number of Positions Loaded=All, Number of Rows=1, Operating Temperature=-, Overall Contact Length=-, Packaging="Cut Tape (CT)", Part Status=Active, Pitch - Mating="0.079\" (2.00mm)", Pricing 1="1=2.23, 10=2.022, 25=1.898, 50=1.8156, 100=1.733 (CAD)", RoHS="RoHS Compliant", Row Spacing - Mating=-, Shrouding="Shrouded - 4 Wall", Stock 1=9367, Style="Board to Cable/Wire", Supplier 1=Digi-Key, Termination=Solder, Voltage Rating=-
P10 P11: library part "CONN 5POS HEADR MALE 0.1\"", Colour=Black, Contact Resistance=20mR, Manufacturer 1=Molex, Manufacturer Part Number 1=0022284050, Max Operating Temperature=75°C, Max Voltage Rating (AC)=250V, Min Operating Temperature=0°C, Supplier Part Number 1=WM50014-05-ND, ComponentLink1Description=https://datasheet.ciiva.com/6814/022284363-sd-6814049.pdf, ComponentLink1URL=https://datasheet.ciiva.com/6814/022284363-sd-6814049.pdf, ComponentLink2Description=https://datasheet.ciiva.com/14804/179390022284050-pcb-headers-14804361.pdf, ComponentLink2URL=https://datasheet.ciiva.com/14804/179390022284050-pcb-headers-14804361.pdf, ComponentLink3Description=https://datasheet.ciiva.com/15217/getdatasheetpartid-256138-15217709.pdf, ComponentLink3URL=https://datasheet.ciiva.com/15217/getdatasheetpartid-256138-15217709.pdf, Connector Type="Male Pin", Contact Material=Bronze,Brass, Contact Mating Length=0.24inch, Contact Plating=Nickel,Tin, Depth=2.49mm, Description 1="Conn Unshrouded Header HDR 5 POS 2.54mm Solder ST Thru-Hole KK® Bag", Gender=Male, Housing Colour=Black, Housing Material=Nylon, Length=12.7mm, Max Voltage Rating (DC)=250V, Mount="Through Hole", Number of Contacts=5, Number of Positions=5, Number of Rows=1, Orientation=Straight, Packaging=Bulk, Pitch=2.54mm, Pricing 1="1=0.22, 10=0.21, 25=0.1796, 50=0.157, 100=0.1459, 250=0.129, 500=0.1234 (USD)", Stock 1=3161, Supplier 1=Digi-Key, Termination=Solder
Q1 Q2 Q3 Q4: Current - Continuous Drain (Id) @ 25°C=8.7A, Drain to Source Voltage (Vdss)=30V, Drive Voltage (Max Rds On,  Min Rds On)="2.5V, 4.5V", Input Capacitance (Ciss) (Max) @ Vds="1019pF @ 25V", Manufacturer 1="Infineon Technologies", Manufacturer Part Number 1=IRLHS6342TRPBF, Operating Temperature="-55°C ~ 150°C (TJ)", Package / Case=6-PowerVDFN, Power Dissipation (Max)=2.1W, Supplier Device Package="6-PQFN (2x2)", Supplier Part Number 1=IRLHS6342TRPBFCT-ND, Category="Discrete Semiconductor Products", ComponentLink1Description=http://www.infineon.com/dgdl/irlhs6342pbf.pdf?fileId=5546d462533600a401535663b52625ad, ComponentLink1URL=http://www.infineon.com/dgdl/irlhs6342pbf.pdf?fileId=5546d462533600a401535663b52625ad, Description 1="MOSFET N-CH 30V 8.7A 2X2 PQFN", FET Feature=-, FET Type=N-Channel, Gate Charge (Qg) (Max) @ Vgs="11nC @ 4.5V", Mounting Type="Surface Mount", Packaging="Cut Tape (CT)", Part Status=Active, Pricing 1="1=0.79, 10=0.685, 100=0.5118, 500=0.4022, 1000=0.31079 (CAD)", Rds On (Max) @ Id, Vgs="15.5 mOhm @ 8.5A, 4.5V", RoHS="RoHS Compliant", Stock 1=9984, Supplier 1=Digi-Key, Technology="MOSFET (Metal Oxide)", Vgs (Max)=±12V, Vgs(th) (Max) @ Id="1.1V @ 10µA"
R1 R3 R11 R12 R14 R15: "RES SMD 0.0 OHM JUMPER 1/4W 0603", Manufacturer 1="Vishay Dale", Manufacturer Part Number 1=CRCW06030000Z0EAHP, Operating Temperature="-55°C ~ 155°C", Package / Case="0603 (1608 Metric)", Power (Watts)=1/4W, Resistance=0.0, Supplier Device Package=0603, Supplier Part Number 1=541-0.0SBCT-ND, ComponentLink1Description=http://www.vishay.com/docs/20043/crcwhpe3.pdf, ComponentLink1URL=http://www.vishay.com/docs/20043/crcwhpe3.pdf, Composition="Thick Film", Failure Rate=-, Height - Seated (Max)="0.022\" (0.55mm)", Packaging="Cut Tape (CT)", Part Status=Active, Size / Dimension="0.063\" L x 0.033\" W (1.60mm x 0.85mm)", Supplier 1=Digi-Key
R2 R8 R16: "RES SMD 604 OHM 1% 1/10W 0603", Manufacturer 1=Yageo, Manufacturer Part Number 1=RC0603FR-07604RL, Operating Temperature="-55°C ~ 155°C", Package / Case="0603 (1608 Metric)", Power=1/10W, Resistance=604, Supplier Device Package=0603, Supplier Part Number 1=311-604HRCT-ND, Temperature Coefficient=±100ppm/°C, Tolerance=±1%, ComponentLink1Description=http://www.yageo.com/documents/recent/PYu-RC_Group_51_RoHS_L_7.pdf, ComponentLink1URL=http://www.yageo.com/documents/recent/PYu-RC_Group_51_RoHS_L_7.pdf, Composition="Thick Film", Failure Rate=-, Height - Seated (Max)="0.022\" (0.55mm)", Packaging="Cut Tape (CT)", Part Status=Active, Size / Dimension="0.063\" L x 0.031\" W (1.60mm x 0.80mm)", Supplier 1=Digi-Key
R4 R17 R28 R29 R32 R33: "4.7k Ohm ±1% 0.1W, 1/10W Chip Resistor 0603 (1608 Metric) Moisture Resistant Thick Film", Manufacturer 1=Yageo, Manufacturer Part Number 1=RC0603FR-074K7L, Operating Temperature="-55°C ~ 155°C", Package / Case="0603 (1608 Metric)", Power (Watts)=1/10W, Resistance (Ohms)=4.7k, Supplier Device Package=0603, Supplier Part Number 1=311-4.70KHRCT-ND, Temperature Coefficient=±100ppm/°C, Tolerance=±1%, Category=Resistors, ComponentLink1Description=http://www.yageo.com/documents/recent/PYu-RC_Group_51_RoHS_L_7.pdf, ComponentLink1URL=http://www.yageo.com/documents/recent/PYu-RC_Group_51_RoHS_L_7.pdf, Composition="Thick Film", Description 1="RES SMD 4.7K OHM 1% 1/10W 0603", Failure Rate=-, Features="Moisture Resistant", Height - Seated (Max)="0.022\" (0.55mm)", Packaging="Cut Tape (CT)", Part Status=Active, Pricing 1="1=0.16, 10=0.022, 100=0.0089, 1000=0.00402, 2500=0.00349 (CAD)", RoHS="RoHS Compliant", Size / Dimension="0.063\" L x 0.031\" W (1.60mm x 0.80mm)", Stock 1=3487566, Supplier 1=Digi-Key
R5 R9: library part "RES 2K OHM 1% 1/10W 0603", "2k Ohm ±1% 0.1W, 1/10W Chip Resistor 0603 (1608 Metric) Moisture Resistant Thick Film", Manufacturer=Yageo, Manufacturer Part Number=RC0603FR-072KL, Operating Temperature="-55°C ~ 155°C", Package / Case="0603 (1608 Metric)", Power (Watts)="0.1W, 1/10W", Resistance (Ohms)=2k, Supplier Device Package=0603, Supplier Part Number 1=311-2.00KHRCT-ND, Temperature Coefficient=±100ppm/°C, Tolerance=±1%, Category=Resistors, ComponentLink1Description=http://www.yageo.com/documents/recent/PYu-RC_Group_51_RoHS_L_7.pdf, ComponentLink1URL=http://www.yageo.com/documents/recent/PYu-RC_Group_51_RoHS_L_7.pdf, Composition="Thick Film", Failure Rate=-, Features="Moisture Resistant", Height - Seated (Max)="0.022\" (0.55mm)", Packaging="Cut Tape (CT)", Part Status=Active, Pricing 1="1=0.15, 10=0.023, 100=0.0093, 1000=0.00415, 2500=0.0036 (CAD)", RoHS="RoHS Compliant", Size / Dimension="0.063\" L x 0.031\" W (1.60mm x 0.80mm)", Stock 1=1750701, Supplier 1=Digi-Key
R6 R10: "RES SMD 120 OHM 1% 1/10W 0603", Manufacturer 1=Yageo, Manufacturer Part Number 1=RC0603FR-07120RL, Operating Temperature="-55°C ~ 155°C", Package / Case="0603 (1608 Metric)", Power=1/10W, Resistance=120, Supplier Device Package=0603, Supplier Part Number 1=311-120HRCT-ND, Temperature Coefficient=±100ppm/°C, Tolerance=±1%, ComponentLink1Description=http://www.yageo.com/documents/recent/PYu-RC_Group_51_RoHS_L_7.pdf, ComponentLink1URL=http://www.yageo.com/documents/recent/PYu-RC_Group_51_RoHS_L_7.pdf, Composition="Thick Film", Failure Rate=-, Height - Seated (Max)="0.022\" (0.55mm)", Packaging="Cut Tape (CT)", Part Status=Active, Size / Dimension="0.063\" L x 0.031\" W (1.60mm x 0.80mm)", Supplier 1=Digi-Key
R7 R13: "RES SMD 1.4K OHM 1% 1/10W 0603", Manufacturer 1=Yageo, Manufacturer Part Number 1=RC0603FR-071K4L, Operating Temperature="-55°C ~ 155°C", Package / Case="0603 (1608 Metric)", Power=1/10W, Resistance=1.4k, Supplier Device Package=0603, Supplier Part Number 1=311-1.40KHRCT-ND, Temperature Coefficient=±100ppm/°C, Tolerance=±1%, ComponentLink1Description=http://www.yageo.com/documents/recent/PYu-RC_Group_51_RoHS_L_7.pdf, ComponentLink1URL=http://www.yageo.com/documents/recent/PYu-RC_Group_51_RoHS_L_7.pdf, Composition="Thick Film", Failure Rate=-, Height - Seated (Max)="0.022\" (0.55mm)", Packaging="Cut Tape (CT)", Part Status=Active, Size / Dimension="0.063\" L x 0.031\" W (1.60mm x 0.80mm)", Supplier 1=Digi-Key
R18 R19 R21 R22 R23 R24 R25 R26 R31 R36 R37: "RES SMD 10K OHM 1% 1/10W 0603", Manufacturer 1=Yageo, Manufacturer Part Number 1=RC0603FR-0710KL, Operating Temperature="-55°C ~ 155°C", Package / Case="0603 (1608 Metric)", Power=1/10W, Resistance=10k, Supplier Device Package=0603, Supplier Part Number 1=311-10.0KHRCT-ND, Temperature Coefficient=±100ppm/°C, Tolerance=±1%, ComponentLink1Description=http://www.yageo.com/documents/recent/PYu-RC_Group_51_RoHS_L_7.pdf, ComponentLink1URL=http://www.yageo.com/documents/recent/PYu-RC_Group_51_RoHS_L_7.pdf, Composition="Thick Film", Failure Rate=-, Height - Seated (Max)="0.022\" (0.55mm)", Packaging="Cut Tape (CT)", Part Status=Active, Size / Dimension="0.063\" L x 0.031\" W (1.60mm x 0.80mm)", Supplier 1=Digi-Key
R20 R30 R34 R35: "22.1 Ohm ±1% 0.1W, 1/10W Chip Resistor 0603 (1608 Metric) Moisture Resistant Thick Film", Manufacturer 1=Yageo, Manufacturer Part Number 1=RC0603FR-0722R1L, Operating Temperature="-55°C ~ 155°C", Package / Case="0603 (1608 Metric)", Power=1/10W, Resistance=22.1, Supplier Device Package=0603, Supplier Part Number 1=311-22.1HRCT-ND, Temperature Coefficient=±100ppm/°C, Tolerance=±1%, ComponentLink1Description=http://www.yageo.com/documents/recent/PYu-RC_Group_51_RoHS_L_7.pdf, ComponentLink1URL=http://www.yageo.com/documents/recent/PYu-RC_Group_51_RoHS_L_7.pdf, Composition="Thick Film", Failure Rate=-, Height - Seated (Max)="0.022\" (0.55mm)", Packaging="Cut Tape (CT)", Part Status=Active, Size / Dimension="0.063\" L x 0.031\" W (1.60mm x 0.80mm)", Supplier 1=Digi-Key
R27: "806 Ohm ±1% 0.1W, 1/10W Chip Resistor 0603 (1608 Metric) Moisture Resistant Thick Film", Manufacturer 1=Yageo, Manufacturer Part Number 1=RC0603FR-07806RL, Operating Temperature="-55°C ~ 155°C", Package / Case="0603 (1608 Metric)", Power=1/10W, Resistance=806, Supplier Device Package=0603, Supplier Part Number 1=311-806HRCT-ND, Temperature Coefficient=±100ppm/°C, Tolerance=±1%, ComponentLink1Description=http://www.yageo.com/documents/recent/PYu-RC_Group_51_RoHS_L_7.pdf, ComponentLink1URL=http://www.yageo.com/documents/recent/PYu-RC_Group_51_RoHS_L_7.pdf, Composition="Thick Film", Failure Rate=-, Height - Seated (Max)="0.022\" (0.55mm)", Packaging="Cut Tape (CT)", Part Status=Active, Size / Dimension="0.063\" L x 0.031\" W (1.60mm x 0.80mm)", Supplier 1=Digi-Key
U1 U2: "IC COMM INTERFACE ISOSPI 16-QFN", Manufacturer="Linear Technology", Manufacturer Part Number=LTC6820IUD#PBF, Package / Case="16-WFQFN Exposed Pad", Supplier Device Package="16-QFN (3x3)", Supplier Part Number 1=LTC6820IUD#PBF-ND, Voltage - Supply="2.7 V ~ 5.5 V", Applications="Isolated Communications Interface", Category="Integrated Circuits (ICs)", ComponentLink1Description=http://www.linear.com/docs/42317, ComponentLink1URL=http://www.linear.com/docs/42317, Interface=SPI, Mounting Type="Surface Mount", Packaging=Tube, Part Status=Active, Pricing 1="1=7.35, 25=4.8816, 100=4.0066 (CAD)", RoHS="RoHS Compliant", Stock 1=827, Supplier 1=Digi-Key
U3: library part "IC DVR HIGH-SIDE 1CH POWERSSO-16", "IC, High Side Drive, 4V - 28V, 24A, 40 mOhm"
XFMR1: "PULSE XFMR 1CT:1CT 350UH SMD", Inductance=350uH, Isolation Voltage=1.5kVrms, Manufacturer="Bourns Inc.", Supplier Part Number 1=PT61018AAPEL-SCT-ND, MFG_PN=PT61018AAPEL-S, Supplier=Digikey, Supplier 1=Digi-Key, Supplier_PN=PT61018AAPEL-SCT-ND

## Free pads (board coordinates)
  round 2.7 hole 2.7: ""(-17.5,2.5) ""(-17.5,47.5) ""(2.5,2.5) ""(2.5,37.5) ""(36.5,2.5) ""(36.5,27.5) ""(66.5,2.5) ""(66.5,27.5) ""(97.5,2.5) ""(97.5,37.5)

## Via types
v1: diameter 0.6, hole 0.3, Top Layer to Bottom Layer, tented both sides, 12 vias
v2: diameter 0.5, hole 0.2, Top Layer to Bottom Layer, 6 vias

## Nets (pads, with @x,y where several pads share a name; then routed paths per layer and width w, separated by ;. In a path a pad name is that pad's centre, name@x,y a point inside that pad or via, vN(x,y) a via of type N, cw(c..) or ccw(c..) an arc to the next point about the centre after c; other vN are vias at no path point)
3V3: C1.1 C3.1 P1.40 P1.41 P1.42 P1.43 P1.44 P1.45 R1.1 R5.1 R9.1 R11.1 R12.1 U1.5 U1.6 U1.7 U1.8 U1.11 U1.16 U2.5 U2.8 U2.11 U2.16 | length 3
  Top Layer w0.203: v1(66.25,8.5) 66.25,9.25 66.575,9.575 U2.5 ; U2.16 v1(67.25,13.5)
12V_KILL_SW: C5.1 C6.1 C7.1 C8.1 D1.2 D3.2 P2.1 P5.1 R17.1 R28.1 U3.13 U3.14 U3.15 U3.16
+12V: C9.1 C10.1 D6.2 D7.2 F1.1 P1.47 P1.48 P1.49 P1.50 P3.1 P4.1 P6.1 P8.1 R4.1 R32.1 R33.1 U3.17
  other v2: 12.65,12.45 13.75,12.45 14.85,12.45 12.65,13.55 13.75,13.55 14.85,13.55
CURR_ISOSPI_N: P8.3 XFMR1.14 | length 9.3
  Top Layer w0.254: XFMR1.14 76.667,22.127 76.667,23.417 78.65,25.4 P8.3
CURR_ISOSPI_P: P8.4 XFMR1.16 | length 9.5
  Top Layer w0.254: XFMR1.16 74.127,22.127 74.127,24.469 76.65,26.992 P8.4
CURR_N: R10.2 TP4.TP U2.9 XFMR1.3
CURR_P: R10.1 TP3.TP U2.10 XFMR1.1
GND: C1.2 C2.2 C3.2 C4.2 C5.2 C6.2 C7.2 C8.2 C9.2 C10.2 D2.1 D4.2 D5.1 LED1.2 LED2.2 P1.1 P1.2 P1.3 P1.4 P1.26 P1.27 P1.28 P1.29 P3.3 P4.2 P6.3 P8.2 P10.5 P11.5 Q1.4 Q1.8 Q2.4 Q2.8 Q3.4 Q3.8 Q4.4 Q4.8 R3.2 R8.2 R14.2 R15.2 R16.2 R18.1 R21.2 R27.2 R29.2 R31.2 R36.2 R37.2 U1.12 U1.13 U1.17 U2.12 U2.13 U2.17
I_N: R6.2 TP2.TP U1.9 XFMR1.8
I_P: R6.1 TP1.TP U1.10 XFMR1.6
ISOSPI_N: P9.1 XFMR1.9
ISOSPI_P: P9.2 XFMR1.11
NetC2_1: C2.1 XFMR1.7
NetC4_1: C4.1 XFMR1.2
NetD1_1: D1.1 D2.2 LED3.2 P2.2 Q1.1 Q1.2 Q1.5 Q1.6 Q1.7
NetD3_1: D3.1 D5.2 LED4.2 P5.2 Q2.1 Q2.2 Q2.5 Q2.6 Q2.7
NetD4_1: D4.1 R29.1 U3.4
NetD6_1: D6.1 LED5.2 P3.2 Q3.1 Q3.2 Q3.5 Q3.6 Q3.7
NetD7_1: D7.1 LED6.2 P6.2 Q4.1 Q4.2 Q4.5 Q4.6 Q4.7
NetF1_2: F1.2 P7.1
NetLED1_1: LED1.1 R2.2
NetLED2_1: LED2.1 R4.2
NetLED3_1: LED3.1 R17.2
NetLED4_1: LED4.1 R28.2
NetLED5_1: LED5.1 R32.2
NetLED6_1: LED6.1 R33.2
NetP7_2: P7.2 R18.2 R19.2
NetQ1_3: Q1.3 R20.2
NetQ2_3: Q2.3 R30.2
NetQ3_3: Q3.3 R34.1 | length 2.1
  Top Layer w0.254: Q3.3 44.95,28.93 R34.1
NetQ4_3: Q4.3 R35.1 | length 2.1
  Top Layer w0.254: Q4.3 62.45,28.93 R35.1
NetR1_2: R1.2 R2.1 R3.1
NetR7_1: R7.1 U1.15
NetR7_2: R7.2 R8.1 U1.14
NetR13_1: R13.1 U2.15
NetR13_2: R13.2 R16.1 U2.14
NetR19_1: R19.1 U3.1
NetR20_1: R20.1 R21.1
NetR22_1: R22.1
NetR22_2: R22.2 U3.2
NetR23_1: R23.1 R27.1 U3.7
NetR23_2: R23.2
NetR24_1: R24.1
NetR24_2: R24.2 U3.3
NetR25_1: R25.1
NetR25_2: R25.2 U3.5
NetR26_1: R26.1
NetR26_2: R26.2 U3.6
NetR30_1: R30.1 R31.1
PA0/ADC0: P1.25
PA1: P1.24
PA2: P1.23
PA3/USART2_RX: P1.22
PA4/SPI1_NSS: P1.21 P10.4 U1.4 | length 42
  Top Layer w0.254: P1.21 56.215,11 v1(60.107,7.107) 60.965,6.25 U1.4
  Bottom Layer w0.254: P10.4 56.87,6.12 57.857,7.107 v1(60.107,7.107)
PA5/SPI1_SCK: P1.20 P10.3 U1.3 | length 45.8
  Top Layer w0.254: P1.20 56.779,11.5 v1(60.639,7.639) 61.529,6.75 U1.3
  Bottom Layer w0.254: P10.3 54.33,6.83 55.187,7.687 60.592,7.687 v1(60.639,7.639)
PA6/SPI1_MISO: P1.19 P10.2 R5.2 U1.2 | length 49.3
  Top Layer w0.254: P1.19 57.164,12 60.993,8.171 v1(61.171,8.171) 62.093,7.25 U1.2
  Bottom Layer w0.254: P10.2 51.79,7.29 52.719,8.219 61.124,8.219 v1(61.171,8.171)
PA7/SPI1_MOSI: P1.18 P10.1 U1.1 | length 52.9
  Top Layer w0.254: P1.18 57.907,12.5 v1(61.703,8.703) 62.657,7.75 U1.1
  Bottom Layer w0.254: P10.1 49.25,7.75 50.251,8.751 61.656,8.751 v1(61.703,8.703)
PA8: P1.7
PA9: P1.6 R35.2 R37.1 | length 29.1
  Top Layer w0.254: P1.6 43.5,18.5 44.25,19.25 44.25,25.75 44.75,26.25 60.57,26.25 61,26.68 61,27.25 60.95,27.3 R35.2
PA10: P1.5 R34.2 R36.1 | length 11.8
  Top Layer w0.254: P1.5 43,19 43.5,19.5 43.5,27.33 R36.1 R34.2
PA15: P1.39
PB0: P1.17
PB1: P1.16
PB2: P1.15
PB3: P1.38
PB4: P1.37
PB5: P1.36
PB6/USART1_TX: P1.34
PB7/USART1_RX: P1.33
PB8/I2C1_SCL: P1.32
PB9/I2C1_SDA: P1.31
PB10/USART3_TX/I2C2_SCL: P1.14
PB11/USART3_RX/I2C2_SDA: P1.13
PB12/SPI2_NSS: P1.11 P11.4 U2.4 | length 42
  Top Layer w0.254: P1.11 57.465,16 v1(60.357,13.107) 63.215,10.25 U2.4
  Bottom Layer w0.254: P11.4 51.79,14.21 52.893,13.107 v1(60.357,13.107)
PB13/SPI2_SCK: P1.10 P11.3 U2.3 | length 39.6
  Top Layer w0.254: P1.10 58.207,16.5 60.889,13.818 v1(60.889,13.639) 63.779,10.75 U2.3
  Bottom Layer w0.254: P11.3 54.33,14.67 55.313,13.687 60.842,13.687 v1(60.889,13.639)
PB14/SPI2_MISO: P1.9 P11.2 R9.2 U2.2 | length 37
  Top Layer w0.254: P1.9 58.414,17 61.243,14.171 v1(61.421,14.171) 64.343,11.25 U2.2